# EAGLE board Dual-axis solar tracker (EAGLE 9.7.0)

Size 276.54 x 159.72 mm. Coordinates in mm from the lower left corner, seen from the top.
Outline: 0,0 276.54,0 276.54,159.72 0,159.72 0,0
Copper layers (1*16): Top 0.035mm / dielectric 1.5mm / Bottom 0.035mm
Design rules "default": minimum track width 6mil, minimum drill 0.35mm, track to track 6mil, track to pad 6mil, pad to pad 6mil, via to via 6mil, smd to smd 6mil, copper to edge 40mil, drill to drill 6mil, minimum pad ring 10mil, minimum via ring 8mil, stop-mask expansion 4mil, vias tented up to drill 0mil, thermal gap 10mil

## Footprints (pad centres in the part's own frame; a part is rotated, then mirrored left to right if it is on the bottom)
RESAD1016W63L850D250B = drill 0.83 pad 1.43: 1 -5.08,0; 2 5.08,0
GL5528 = drill 0.8 pad 1.4: 1 -1.702,0; 2 1.702,0
BATTERY-GENERIC = drill 1.118 pad 3.15 octagon: + 2.54,0; - -2.54,0
SG90 = drill 1.016 long: 1 -2.54,0; 2 0,0; 3 2.54,0
ARDUINO-UNO-R3-SHIELD = drill 1.016 pad 1.88: 3.3V 24.13,-2.54; 5V 24.13,0; A0 24.13,12.7; A1 24.13,15.24; A2 24.13,17.78; A3 24.13,20.32; A4 24.13,22.86; A5 24.13,25.4; AREF -24.13,-13.97; D2 -24.13,20.32; D3 -24.13,17.78; D4 -24.13,15.24; D5 -24.13,12.7; D6 -24.13,10.16; D7 -24.13,7.62; D8 -24.13,3.81; D9 -24.13,1.27; D10 -24.13,-1.27; D11 -24.13,-3.81; D12 -24.13,-6.35; D13 -24.13,-8.89; GND@0 24.13,2.54; GND@1 24.13,5.08; GND@2 -24.13,-11.43; IOREF 24.13,-7.62; NC 24.13,-10.16; RES 24.13,-5.08; RX -24.13,25.4; SCL -24.13,-19.05; SDA -24.13,-16.51; TX -24.13,22.86; VIN 24.13,7.62

## Placement (x,y rotation side)
R1  10k  [RESAD1016W63L850D250B]  142.78,11.65 90 top
R2  10k  [RESAD1016W63L850D250B]  137.7,11.65 90 top
R3  10k  [RESAD1016W63L850D250B]  231.68,11.65 90 top
R4  10k  [RESAD1016W63L850D250B]  236.76,11.65 90 top
R5  PHOTOCELL_GL5528  [GL5528]  139.36,136.21 0 top
R6  PHOTOCELL_GL5528  [GL5528]  238.57,137.44 0 top
R7  PHOTOCELL_GL5528  [GL5528]  232.8,62.66 0 top
R8  PHOTOCELL_GL5528  [GL5528]  143.89,60.22 0 top
SC1  BATTERYGENERIC  [BATTERY-GENERIC]  189.17,151.47 0 top
SERVO1  SERVOSG90  [SG90]  269.48,82.72 180 top
SERVO2  SERVOSG90  [SG90]  102.18,99.62 270 top
U1  ARDUINO-UNO-R3-SHIELD  [ARDUINO-UNO-R3-SHIELD]  47.88,29.84 270 top

## Library data of the parts
R1-R8 SC1 SERVO1 SERVO2 U1 = Tinkercad

## Nets
U1_5V: R5.2 R6.2 R7.2 R8.2 SERVO1.2 SERVO2.2 U1.5V
U1_A0: R2.2 R5.1 U1.A0
U1_A1: R1.2 R8.1 U1.A1
U1_A2: R3.2 R7.1 U1.A2
U1_A3: R4.2 R6.1 U1.A3
U1_D9: SERVO1.3 U1.D9
U1_D10: SERVO2.3 U1.D10
U1_GND: R1.1 R2.1 R3.1 R4.1 SERVO1.1 SERVO2.1 U1.GND@0 U1.GND@1 U1.GND@2

## Tracks (layer width: path | path; a pad name or v marks a point on that pad's centre or on a via)
U1_5V  (6 unrouted)
U1_A0  (2 unrouted)
U1_A1  (2 unrouted)
U1_A2  (2 unrouted)
U1_A3  (2 unrouted)
U1_D9  (1 unrouted)
U1_D10  (1 unrouted)
U1_GND  (8 unrouted)